# EAGLE board dexterity (EAGLE 8.6.0)
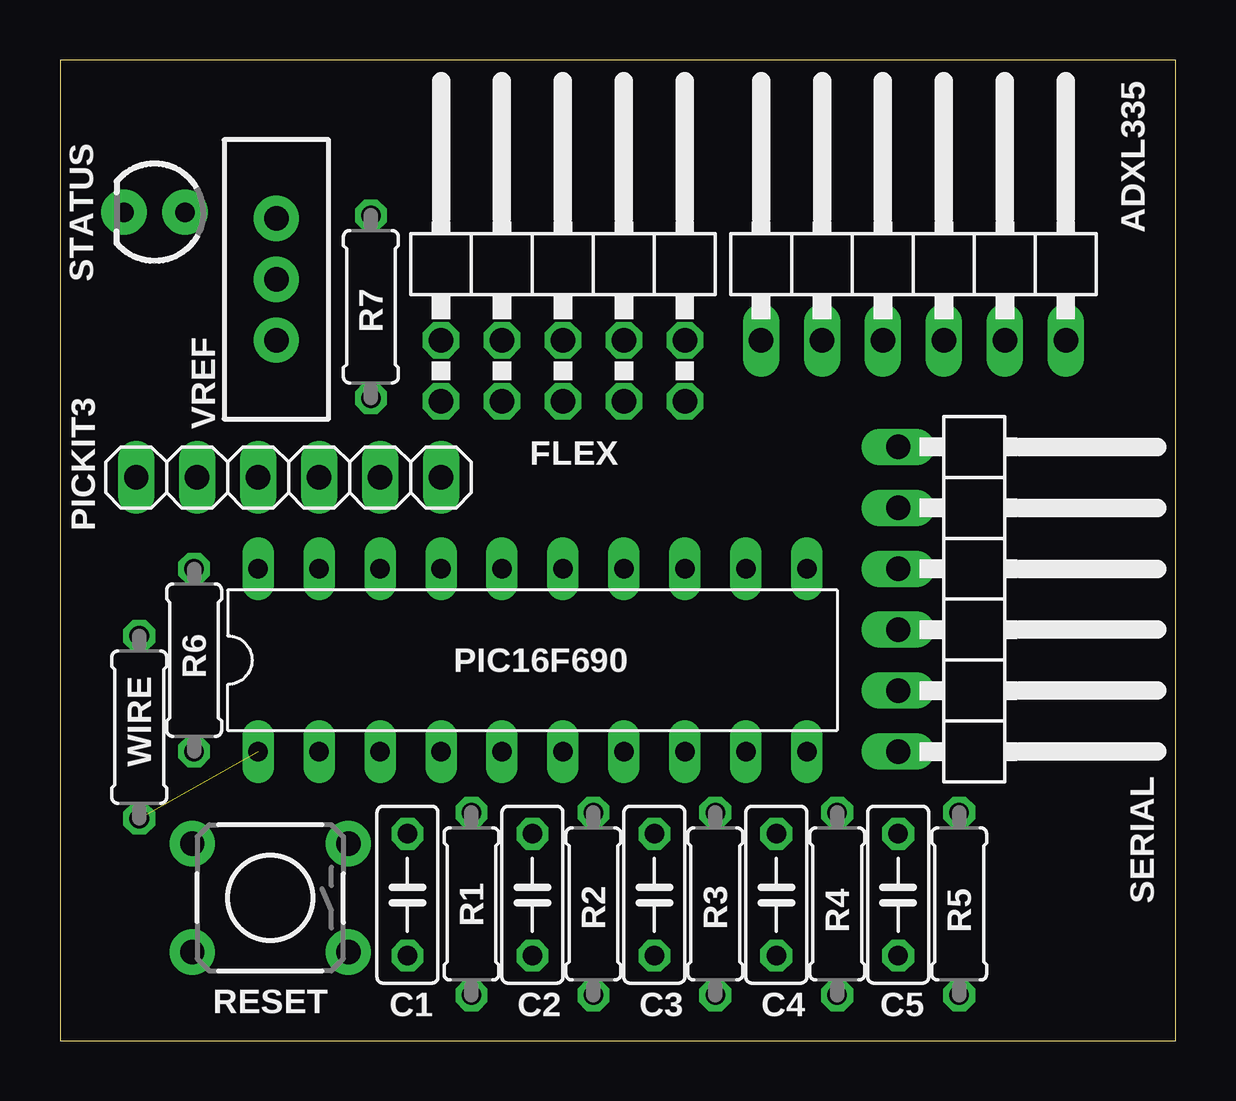
[diagram p0: board, top side]
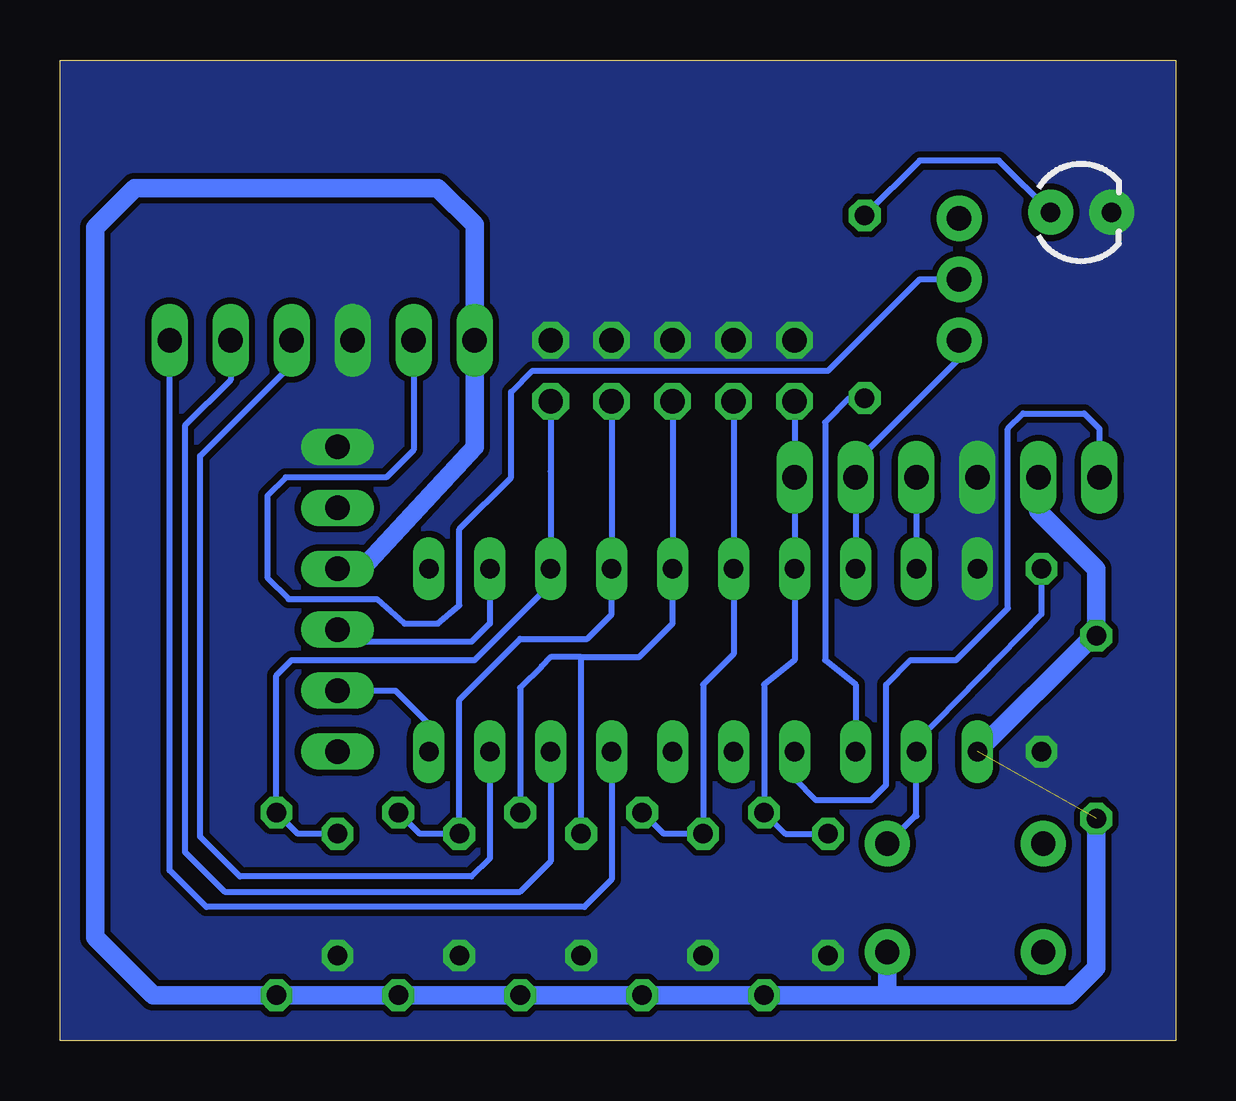
[diagram p1: board, bottom side, seen from below]

Size 46.48 x 40.89 mm. Coordinates in mm from the lower left corner, seen from the top.
Outline: 0,0 46.48,0 46.48,40.89 0,40.89 0,0
Copper layers (1*16): Top 0.035mm / dielectric 1.5mm / Bottom 0.035mm
Design rules "default *": minimum track width 5mil, minimum drill 0.1mm, track to track 9mil, track to pad 9mil, pad to pad 6mil, via to via 6mil, smd to smd 6mil, copper to edge 0mil, drill to drill 6mil, minimum pad ring 10mil, minimum via ring 8mil, stop-mask expansion 4mil, vias tented up to drill 0mil, thermal gap 10mil

## Footprints (pad centres in the part's own frame; a part is rotated, then mirrored left to right if it is on the bottom)
1X06/90 = drill 1.016 long: 1 -6.35,-3.81; 2 -3.81,-3.81; 3 -1.27,-3.81; 4 1.27,-3.81; 5 3.81,-3.81; 6 6.35,-3.81
C050-025X075 = drill 0.813 octagon: 1 -2.54,0; 2 2.54,0
2X05/90 = drill 1.016 octagon: 1 -5.08,-6.35; 2 -5.08,-3.81; 3 -2.54,-6.35; 4 -2.54,-3.81; 5 0,-6.35; 6 0,-3.81; 7 2.54,-6.35; 8 2.54,-3.81; 9 5.08,-6.35; 10 5.08,-3.81
DIL20 = drill 0.813 long: 1 -11.43,-3.81; 2 -8.89,-3.81; 3 -6.35,-3.81; 4 -3.81,-3.81; 5 -1.27,-3.81; 6 1.27,-3.81; 7 3.81,-3.81; 8 6.35,-3.81; 9 8.89,-3.81; 10 11.43,-3.81; 11 11.43,3.81; 12 8.89,3.81; 13 6.35,3.81; 14 3.81,3.81; 15 1.27,3.81; 16 -1.27,3.81; 17 -3.81,3.81; 18 -6.35,3.81; 19 -8.89,3.81; 20 -11.43,3.81
1X06 = drill 1.016 long: 1 -6.35,0; 2 -3.81,0; 3 -1.27,0; 4 1.27,0; 5 3.81,0; 6 6.35,0
0207/7 = drill 0.813 octagon: 1 -3.81,0; 2 3.81,0
TACTILE_SWITCH_PTH_6.0MM = drill 1.016 pad 1.88: 1 -3.251,2.261; 2 3.251,2.261; 3 -3.251,-2.261; 4 3.251,-2.261
LED_3MM = drill 0.813 pad 1.88: A -1.27,0; K 1.27,0
SWITCH_SPDT_PTH_11.6X4.0MM = drill 1.016 pad 1.88: 1 0,2.54; 2 0,0; 3 0,-2.54

## Placement (x,y rotation side)
ADXL335  [1X06/90]  35.56,33.02 0 top
C1  0.1uF  [C050-025X075]  14.48,6.1 270 top
C2  0.1uF  [C050-025X075]  19.68,6.1 270 top
C3  0.1uF  [C050-025X075]  24.77,6.1 270 top
C4  0.1uF  [C050-025X075]  29.84,6.1 270 top
C5  0.1uF  [C050-025X075]  34.92,6.1 270 top
FLEX  [2X05/90]  20.95,33.02 0 top
PIC16F690  [DIL20]  19.68,15.88 0 top
PICKIT3  [1X06]  9.53,23.5 0 top
R1  270R  [0207/7]  17.14,5.71 270 top
R2  270R  [0207/7]  22.23,5.71 270 top
R3  270R  [0207/7]  27.3,5.71 270 top
R4  270R  [0207/7]  32.38,5.71 270 top
R5  270R  [0207/7]  37.47,5.71 270 top
R6  270R  [0207/7]  5.59,15.88 90 top
R7  270R  [0207/7]  12.95,30.61 270 top
RESET  [TACTILE_SWITCH_PTH_6.0MM]  8.76,5.97 180 top
SERIAL  [1X06/90]  38.73,18.41 270 top
STATUS  [LED_3MM]  3.94,34.54 180 top
VREF  [SWITCH_SPDT_PTH_11.6X4.0MM]  9.02,31.75 180 top
WIRE  0R  [0207/7]  3.3,13.08 90 top

## Library data of the parts
ADXL335 FLEX PICKIT3 SERIAL = pinhead
C1-C5 = rcl; SPICEPREFIX: C
PIC16F690 = pic16f690
R1-R7 WIRE = rcl; SPICEPREFIX: R
RESET = SparkFun-Switches; PROD_ID: SWCH-08441; SF_SKU: COM-00097
STATUS = SparkFun-LED; PROD_ID: DIO-08794
VREF = SparkFun-Switches; PROD_ID: SWCH-08261; SF_SKU: COM-00102

## Nets
+5V: ADXL335.1 PIC16F690.1 PICKIT3.2 R1.2 R2.2 R3.2 R4.2 R5.2 RESET.1 SERIAL.3 WIRE.1 WIRE.2
GND: ADXL335.3 C1.2 C2.2 C3.2 C4.2 C5.2 FLEX.2 FLEX.4 FLEX.6 FLEX.8 FLEX.10 PIC16F690.20 PICKIT3.3 R6.1 SERIAL.1 STATUS.K
N$1: ADXL335.2 VREF.2
N$2: PIC16F690.18 PICKIT3.5 VREF.1
N$3: PIC16F690.12 SERIAL.4
N$4: PIC16F690.10 SERIAL.5
N$5: PIC16F690.3 R7.2
N$6: ADXL335.5 PIC16F690.8
N$7: ADXL335.6 PIC16F690.7
N$8: PIC16F690.4 PICKIT3.1
N$9: C2.1 FLEX.3 PIC16F690.16 R2.1
N$10: PIC16F690.19 PICKIT3.4
N$11: C1.1 FLEX.1 PIC16F690.17 PICKIT3.6 R1.1
N$12: C3.1 FLEX.5 PIC16F690.15 R3.1
N$13: C4.1 FLEX.7 PIC16F690.14 R4.1
N$14: C5.1 FLEX.9 PIC16F690.13 R5.1
N$16: ADXL335.4 PIC16F690.9
N$17: R7.1 STATUS.A
N$18: PIC16F690.2 R6.2 RESET.3

## Tracks (layer width: path | path; a pad name or v marks a point on that pad's centre or on a via)
+5V  (1 unrouted)
  Bottom 0.762: SERIAL.3 33.91,19.68 29.21,24.77 ADXL335.1 29.21,34.04 30.73,35.56 43.36,35.56 45.01,33.91 45.01,4.32 42.6,1.91 R5.2 R4.2 R3.2 R2.2 R1.2 12.06,1.91 | RESET.1 12.01,1.96 12.06,1.91 | PICKIT3.2 5.71,22.1 3.3,19.68 WIRE.2 3.43,16.89 PIC16F690.1 | 12.06,1.91 4.45,1.91 3.3,3.05 WIRE.1
GND
  pour Bottom (isolate 0.254, no thermals): 0.13,0.13 46.35,0.13 46.35,40.77 0.13,40.77
N$1
  Bottom 0.254: ADXL335.2 31.75,24.64 32.89,23.5 37.08,23.5 37.85,22.73 37.85,19.3 36.96,18.41 33.27,18.41 32.13,17.4 30.73,17.4 29.84,18.16 29.84,21.34 27.69,23.5 27.69,27.05 26.8,27.94 14.48,27.94 10.67,31.75 VREF.2
N$2
  Bottom 0.254: PIC16F690.18 PICKIT3.5 13.34,24.13 9.02,28.45 VREF.1
N$3
  Bottom 0.254: PIC16F690.12 28.57,17.4 29.34,16.64 34.42,16.64 SERIAL.4
N$4
  Bottom 0.254: SERIAL.5 32.51,14.61 31.11,13.21 PIC16F690.10
N$5
  Bottom 0.254: PIC16F690.3 13.34,14.86 14.61,15.88 14.61,25.78 13.59,26.8 R7.2
N$6
  Bottom 0.254: ADXL335.5 39.37,27.56 41.27,25.65 41.27,7.87 39.62,6.22 27.3,6.22 26.04,7.49 PIC16F690.8
N$7
  Bottom 0.254: PIC16F690.7 23.5,6.73 24.64,5.59 40.39,5.59 41.91,7.11 ADXL335.6
N$8
  Bottom 0.254: PIC16F690.4 15.88,10.92 14.99,10.03 12.7,10.03 12.06,10.67 12.06,14.86 11.05,15.88 9.14,15.88 6.99,18.03 6.99,25.53 6.35,26.16 3.81,26.16 3.17,25.53 PICKIT3.1
N$9
  Bottom 0.254: FLEX.3 PIC16F690.16 18.41,16.13 19.68,14.86 C2.1 21.34,8.64 R2.1
N$10
  Bottom 0.254: PICKIT3.4 PIC16F690.19
N$11
  Bottom 0.254: FLEX.1 PICKIT3.6 PIC16F690.17 15.88,15.88 17.14,14.86 R1.1 16.26,8.64 C1.1
N$12
  Bottom 0.254: FLEX.5 PIC16F690.15 20.95,17.4 22.35,16 24.77,16 | C3.1 24.77,16 | 24.77,16 26.04,16 26.42,15.62 27.3,14.73 R3.1
N$13
  Bottom 0.254: FLEX.7 PIC16F690.14 23.5,17.78 24.51,16.76 27.3,16.76 29.84,14.22 C4.1 31.5,8.64 R4.1
N$14
  Bottom 0.254: FLEX.9 26.04,23.75 PIC16F690.13 26.04,19.05 29.21,15.88 36.83,15.88 37.47,15.24 R5.1 36.58,8.64 C5.1
N$16
  Bottom 0.254: ADXL335.4 36.83,28.19 40.64,24.38 40.64,8.51 38.99,6.86 29.34,6.86 28.57,7.62 PIC16F690.9
N$17
  Bottom 0.254: STATUS.A 7.37,36.7 10.67,36.7 R7.1
N$18
  Bottom 0.254: R6.2 5.59,17.78 10.79,12.45 PIC16F690.2 10.79,9.37 10.87,9.37 RESET.3

## Text on the board
_tsilk: DEXTERITY I | 1 | 2 | 3 | 4 | 5 | 5V | VREF | GND | Z | Y | X | GND | CTS | 5V | TX | RX | RTS